# Altium PCB PCB0007.PcbDoc
Units mil, origin at the board's own origin, x right, y up, seen from the top; angles counter-clockwise.
Board outline 4000 x 2500 mil, 2 copper layers (Top Layer, Bottom Layer), stack 64.8 mil thick; 19 components, 6 nets, 28 pads, 0 vias.
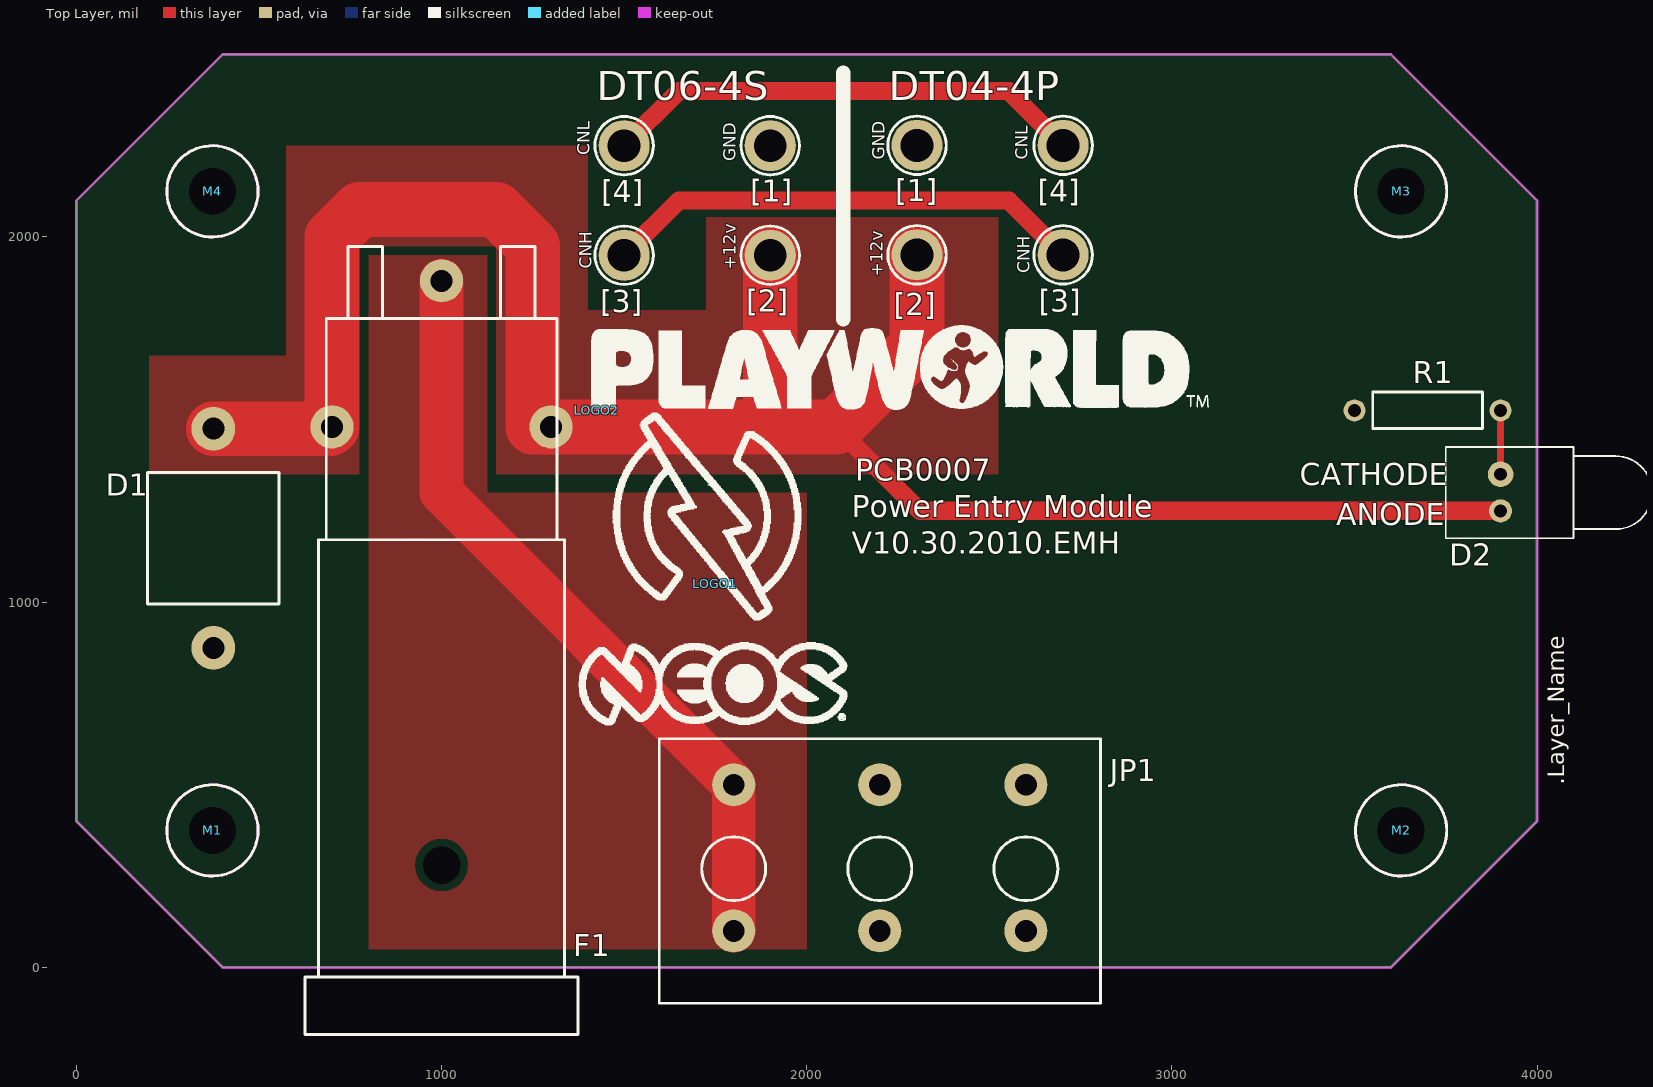
[diagram p0: Top Layer view]
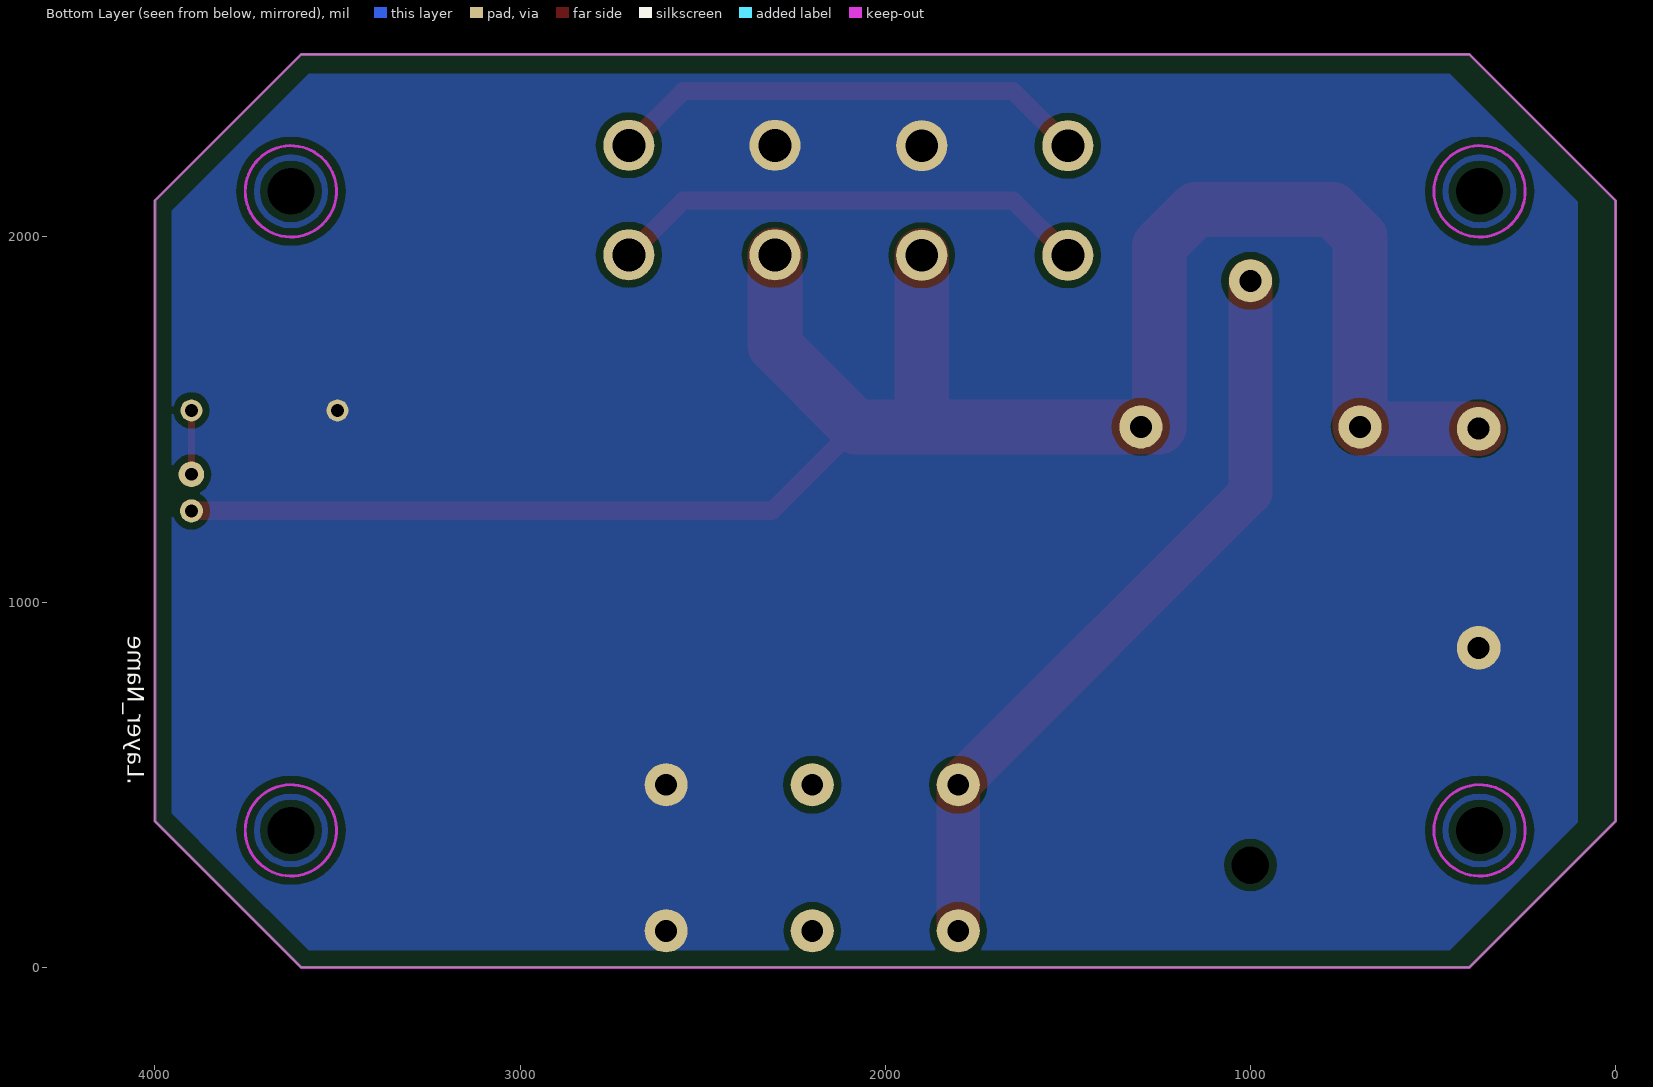
[diagram p1: Bottom Layer view, seen from below]

## Layer stack, top to bottom
Top Layer: signal copper 2.8
Dielectric: core 59.2, FR-4, Dk 4.8
Bottom Layer: signal copper 2.8

## Board outline
400,0 0,400 0,2100 400,2500 3600,2500 4000,2100 4000,400 3600,0

## Design rules (kind name [scope] priority, off if disabled: settings)
Clearance [All] p1: gap=20
ComponentClearance [All] p1: gap=0 collisioncheckmode=3 verticalgap=0 showdistances=FALSE
FabricationTestPointUsage TestPointUsage [All] p1: valid=0 allowmultiple=FALSE
FabricationTestpoint Testpoint [All] p1: side=3 testpointundercomponent=TRUE minsize=40 maxsize=100 preferedsize=60 minholesize=0 maxholesize=40 preferedholesize=32 testpointgrid=1 allowsidetop=TRUE allowsidebottom=TRUE usegrid=TRUE gridtolerance=0.01
Height [All] p1: minheight=0 maxheight=99999 prefheight=1000
HoleSize [All] p1: absolutevalues=TRUE maxlimit=500 minlimit=1 maxpercent=80.000 minpercent=20.000
PolygonConnect [All] p1: connectstyle=Direct reliefconductorwidth=30 reliefentries=4 polygonreliefangle="90 Angle"
RoutingVias [All] p1: holewidth=28 width=50 viastyle="Through Hole" minholewidth=28 minwidth=50 maxholewidth=28 maxwidth=50
SilkToSilkClearance [All] p1: silktosilkclearance=0
SilkscreenOverComponentPads [All] p1: minsilkscreentomaskgap=0
SolderMaskExpansion [All] p1: expansion=4
Width [All] p1: maxlimit=200 minlimit=10 preferedwidth=200
21 further rules are at their usual default settings.

## Classes and differential pairs
component class ELC0205: [1] [2] [3] [4] D1 D2 F1 JP1 LOGO1 LOGO2 M1 M2 M3 M4 R1

## Components (designator, comment, footprint, x,y, rotation, side; value= is the part's Value field where it differs from the comment)
[1] "GND" WIRE_14GA 1900,2250 r0 top (schematic designator J1)
[1] "GND" WIRE_14GA 2302,2251 r0 top (schematic designator J5)
[2] "+12v" WIRE_14GA 1900,1950 r0 top (schematic designator J2)
[2] "+12v" WIRE_14GA 2302,1951 r0 top (schematic designator J6)
[3] "CNH" WIRE_14GA 1500,1950 r0 top (schematic designator J3)
[3] "CNH" WIRE_14GA 2702,1951 r0 top (schematic designator J7)
[4] "CNL" WIRE_14GA 1500,2250 r0 top (schematic designator J4)
[4] "CNL" WIRE_14GA 2702,2251 r0 top (schematic designator J8)
D1 "15KPA24CA" 15KP 375,1175 r90 top
D2 "HLMP-3301-D00B2" LED-2 3900,1300 r0 top
F1 "30A Fuse Holder" "SCHURTER 0031.2500" 1000,280 r0 top
JP1 "1929520" MKDS10 2200,500 r0 top
LOGO1 "NEOS_LOGO" NEOS_LOGO_0 1750,1050 r0 top
LOGO2 "NEOS_LOGO" FULL_LOGO_1 1425,1525 r0 top
M1 "Mounting Hole #4 Screw" MHole#4 372.5,375 r0 top locked
M2 "Mounting Hole #4 Screw" MHole#4 3627.5,375 r0 top locked
M3 "Mounting Hole #4 Screw" MHole#4 3627.5,2125 r0 top locked
M4 "Mounting Hole #4 Screw" MHole#4 372.5,2125 r0 top locked
R1 "1k" "R01M025 Axial 0.4" 3500,1525 r0 top

## Footprints (in the part's own frame and the unit in brackets; to place one, negate y for a bottom-side part, rotate by r counter-clockwise, add the part's x,y. Pads: shape width x height; smd on the part's side, far side on the other; paste and mask are expansions set on the pad)
15KP [mil] "15000W Axial Leaded Transient Voltage Suppressor"
  round 120 hole 60: 1(-300,0) 2(300,0)
  silkscreen extent -180,-180 180,180
FULL_LOGO_1 [mil]
  silkscreen extent -15,3 1675,233
LED-2 [mil] "Typical RED GaAs LED; 2 Leads"
  round 62.99 hole 35: 1(0,-50)
  round 70 hole 35: 2(0,50)
  silkscreen extent -150,-125 415,125
MHole#4 [mil] "Mounting Hole for #4 screw"
  round 0 hole 128 unplated: 0(0,0)
  Keep-Out Layer circle w8: c0,0 r125
  silkscreen extent -125,-125 125,125
MKDS10 [mm] "Phoenix Contact MKDS 10 52AMP a0.16mm pitch"
  round 3 hole 1.524: 1(-10.16,-10.16) 1(-10.16,0) 2(0,-10.16) 2(0,0) 3(10.16,-10.16) 3(10.16,0)
  silkscreen extent -15.34,-15.2 15.34,3.2
NEOS_LOGO_0 [mil]
  silkscreen extent -375,-386 361,468
"R01M025 Axial 0.4" [mil]
  round 60 hole 35: 1(0,0) 2(400,0)
  silkscreen extent 50,-50 350,50
"SCHURTER 0031.2500" [mm] "Schurter 30 AMP Shock Safe Horizontal"
  round 0 hole 2.6 unplated: 0(0,0)
  round 3 hole 1.524: 1(0,40.64) 2(-7.62,30.48) 2(7.62,30.48)
  silkscreen extent -9.5,-11.77 9.5,43.03
WIRE_14GA [mil] "Hole for 14GA stranded wire"
  round 140 hole 90: 1(0,0)
  silkscreen extent -80,-80 80,80

## Part data
[1] [1] [2] [2] [3] [3] [4] [4]: library part ~14GA_WIRE
D1: library part 15KP, "15000W Axial Leaded Transient Voltage Suppressor"
D2: library part LRDLN21RPHLP, "LED 5MM GAP RED RT ANGLE HOUSING"
F1: library part "Fuse 2", "Shock-Safe Fuseholder, 5 x 20 / 6.3 x 32 mm, Slot Knob, horizontal"
JP1: library part "Header 3", "Fixed Terminal Blocks MKDSP 10 HV/ 3-10."
M1 M2 M3 M4: library part MountingHole_4
R1: library part R01M025, "RES 1.0K OHM CARBON FILM 1/4W 5%"

## Nets (pads, with @x,y where several pads share a name; then routed paths per layer and width w, separated by ;. In a path a pad name is that pad's centre, name@x,y a point inside that pad or via, vN(x,y) a via of type N, cw(c..) or ccw(c..) an arc to the next point about the centre after c; other vN are vias at no path point)
+12V_IN: F1.1 JP1.1 | length 2111.4
  Top Layer w120: F1.1 1000,1300 1800,500 JP1.1@1800,100
+12V_OUT: [2].1 D1.2 D2.1 F1.2 | length 5742.8
  Top Layer w50: 2080,1480 2310,1250 D2.1
  Top Layer w150: D1.2 695,1475 700,1480 700,2000 775,2075 1150,2075 1250,1975 1250,1480 1900,1480 ; [2].1@1900,1950 1900,1480 ; [2].1@2302,1951 2302,1702 2080,1480 1900,1480
CANH: [3].1 | length 1325.8
  Top Layer w50: [3].1@1500,1950 1650,2100 2553,2100 [3].1@2702,1951
CANL: [4].1 | length 1325.8
  Top Layer w50: [4].1@1500,2250 1650,2400 2553,2400 [4].1@2702,2251
GND: [1].1 D1.1 JP1.3 R1.1
NetD2_2: D2.2 R1.2 | length 175
  Top Layer w20: D2.2 R1.2
pads on no net: F1.0 JP1.2 M1.0 M2.0 M3.0 M4.0

## Polygon pours and split planes (outlines as drawn)
GND on Bottom Layer "GND" (solid, pour order 1000): 104,2097 104,497 104,397 404,97 454,47 604,47 3579,47 3804,272 3954,422 3954,2047 3954,2072 3579,2447 2129,2447 454,2447 104,2097
+12V_OUT on Top Layer "VOUT" (solid): 200,1675 575,1675 575,2250 1400,2250 1400,1800 1625,1800 1725,1800 1725,2050 1725,2075 2500,2075 2525,2075 2525,1375 2525,1350 1200,1350 1150,1350 1150,1975 775,1975 775,1375 775,1350 200,1350 200,1675
+12V_IN on Top Layer "VIN" (solid): 1725,50 800,50 800,1950 1125,1950 1125,1400 1125,1300 1500,1300 2000,1300 2000,50 1725,50

## Keep-outs
Keep-Out Layer:
  the board outline again, w8

## Other copper
Top Layer:
  text ".Layer_Name" at 4075,500 h45 r90
Bottom Layer:
  text ".Layer_Name" at 4075,500 h45 r90

## Silkscreen, mask and mechanical layers (free items; w line width, h text height)
Top Overlay:
  lines w40: 2100,1775 2100,2450
  text "DT06-4S" at 1425,2375 h80
  text "DT04-4P" at 2225,2375 h80
  text "CNL" at 1406,2224 h34 r90
  text "CNL" at 2605,2212 h34 r90
  text "GND" at 2213,2211 h34 r90
  text "GND" at 1805,2207 h34 r90
  text "CNH" at 1411,1913 h34 r90
  text "+12v" at 1805,1910 h34 r90
  text "CNH" at 2610,1901 h34 r90
  text "+12v" at 2208,1891 h34 r90
  text "PCB0007" at 2133,1332 h60
  text "CATHODE" at 3350,1320 h60
  text "Power Entry Module" at 2123,1232 h60
  text "ANODE" at 3450,1210 h60
  text "V10.30.2010.EMH" at 2123,1132 h60
  text ".Layer_Name" at 4075,500 h45 r90
Bottom Overlay:
  text ".Layer_Name" at 4075,500 h45 r90
Top Solder:
  text ".Layer_Name" at 4075,500 h45 r90
Bottom Solder:
  text ".Layer_Name" at 4075,500 h45 r90
Board Outline:
  the board outline again, w8
  text ".Layer_Name" at 4075,500 h45 r90
Dimesions:
  text ".Layer_Name" at 4075,500 h45 r90
Drill Drawing:
  text ".Layer_Name" at 4075,500 h45 r90

## Dimensions
372.5,2125 to 3627.5,2125 on Dimesions
372.5,375 to 372.5,2125 on Dimesions
400,0 to 400,2500 on Dimesions
400,0 to 372.5,375 on Dimesions
400,0 to 0,400 on Dimesions
372.5,2125 to 400,2500 on Dimesions
400,2500 to 0,2100 on Dimesions
0,2100 to 400,2500 on Dimesions
372.5,2125 to 0,2100 on Dimesions
3600,2500 to 4000,400 on Dimesions
4000,2100 to 3627.5,2125 on Dimesions
4000,2100 to 0,2100 on Dimesions